# Altium PCB PCB_ch582_2022-06-16.pcbdoc
Units mil, origin at the board's own origin, x right, y up, seen from the top; angles counter-clockwise.
Board outline 2825 x 3330 mil, 2 copper layers (Top Layer, Bottom Layer); 23 components, 42 nets, 138 pads, 30 vias.
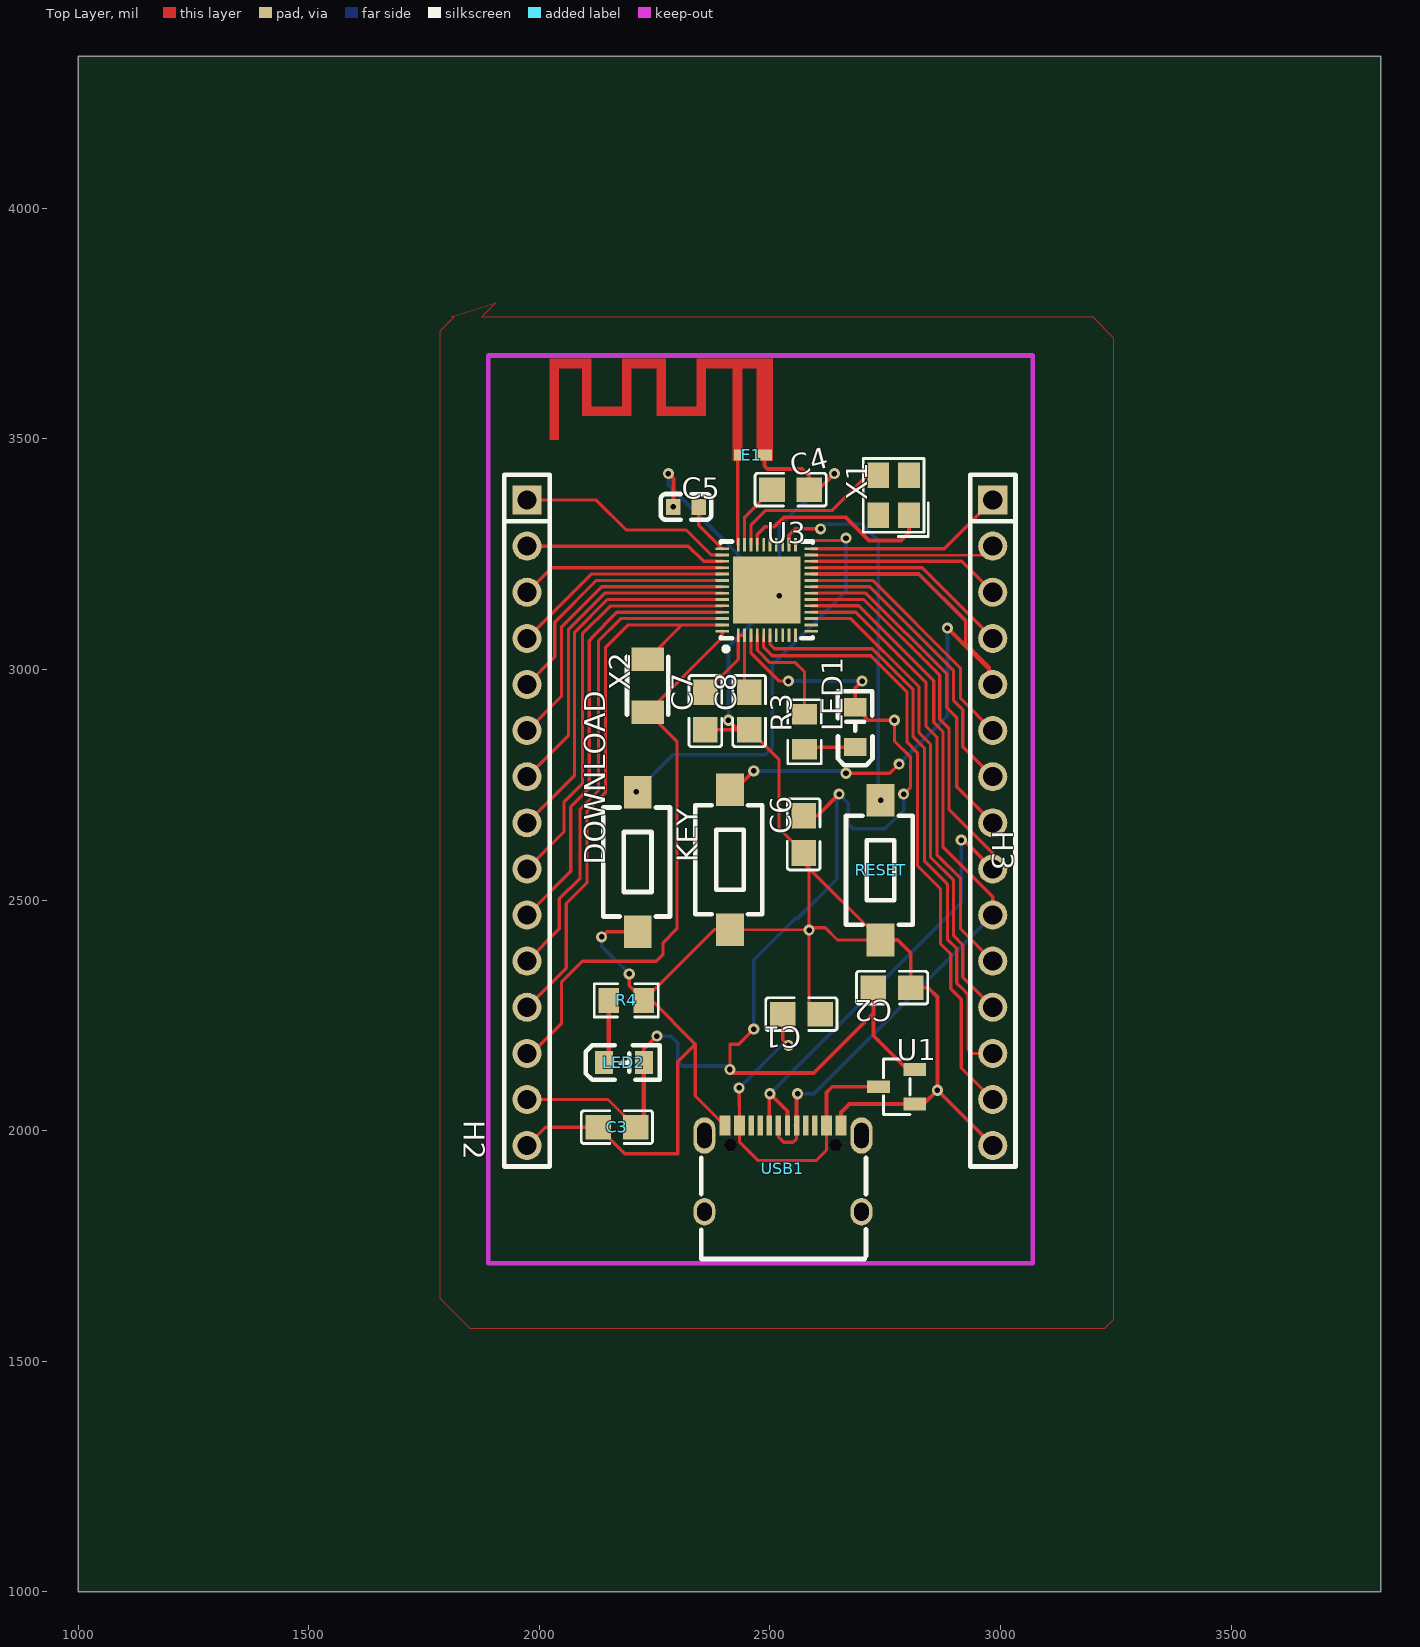
[diagram p0: Top Layer view]
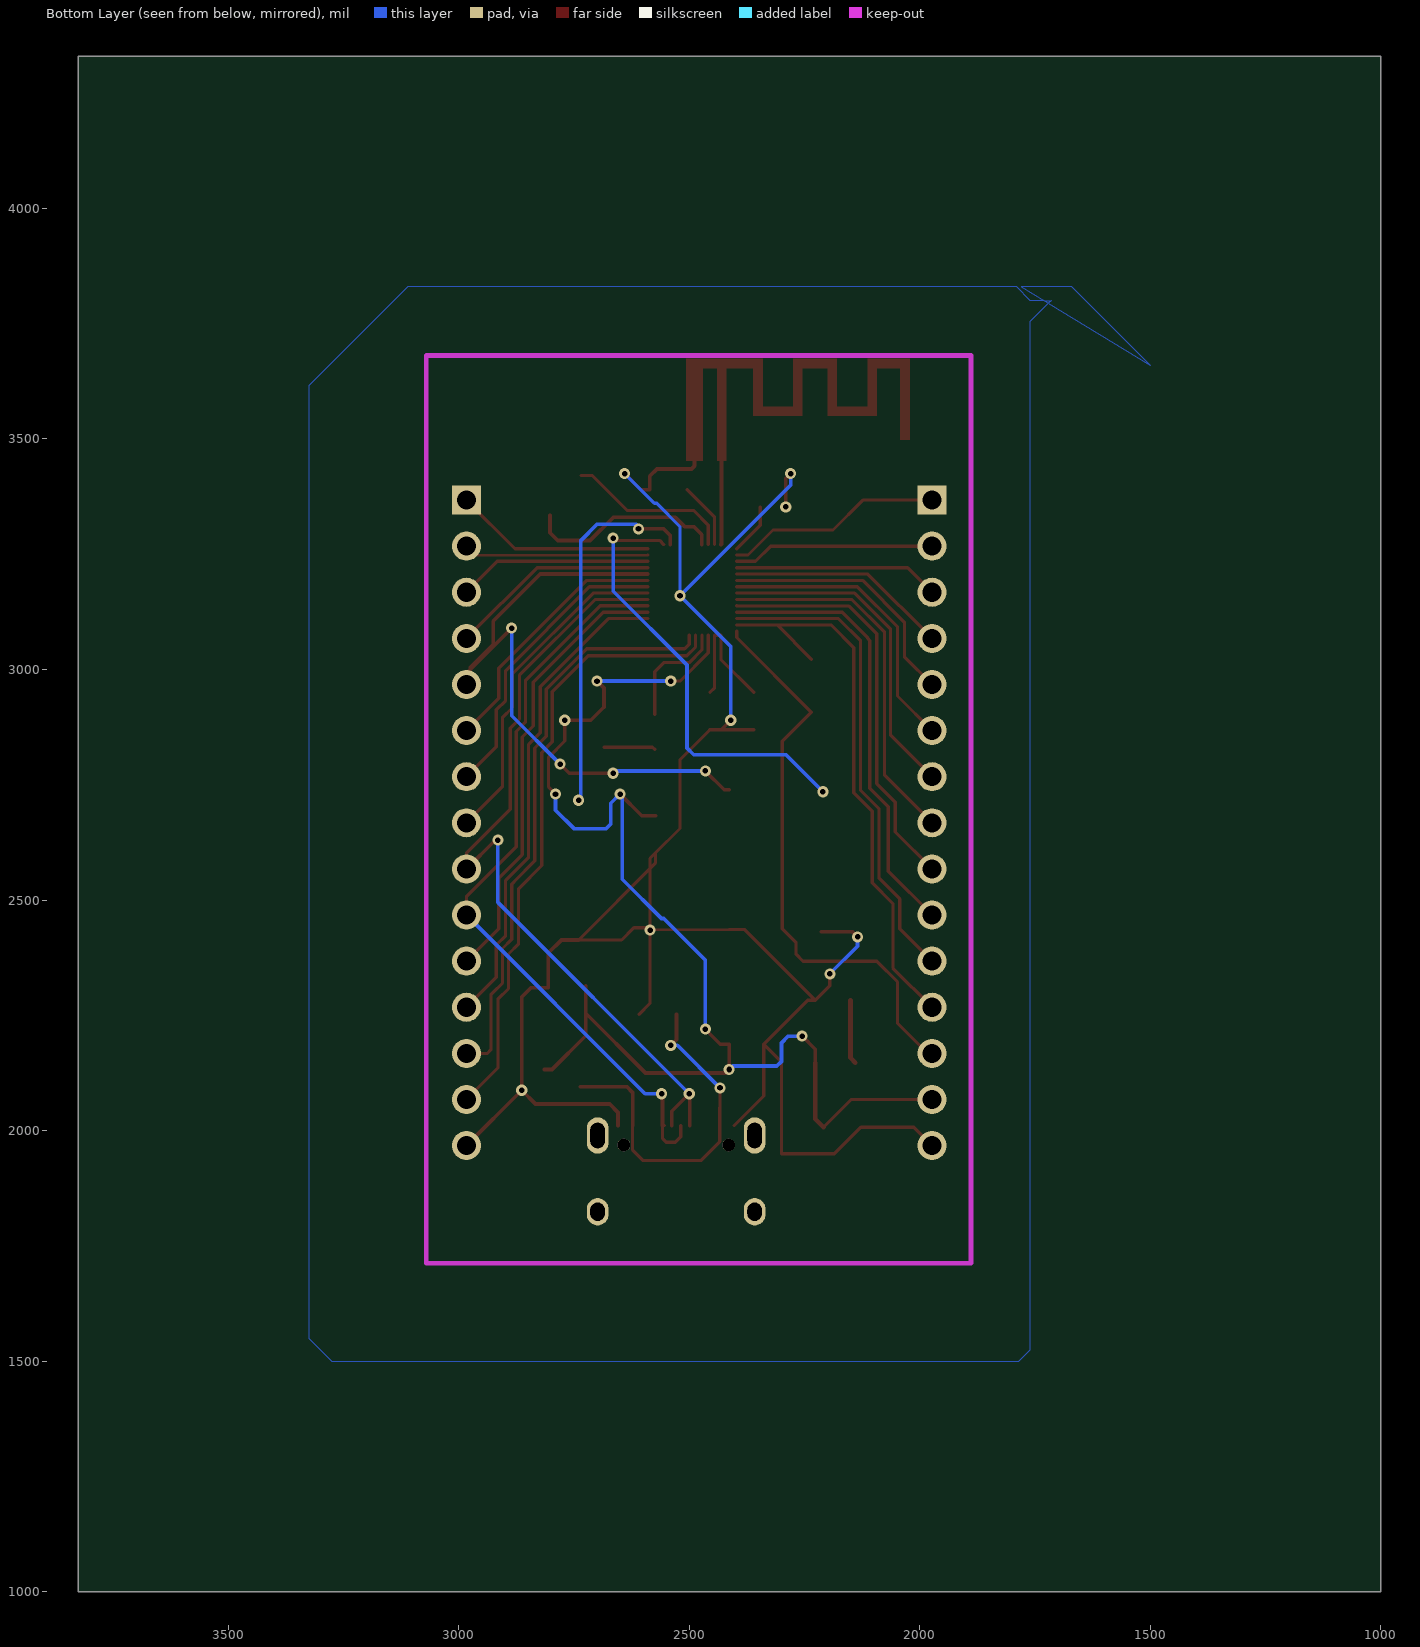
[diagram p1: Bottom Layer view, seen from below]

## Layer stack, top to bottom
Top Layer: signal copper (thickness not stored)
Dielectric: dielectric 12.6, FR-4, Dk 4.8
Bottom Layer: signal copper (thickness not stored)

## Board outline
3825,1000 1000,1000 1000,4330 3825,4330

## Components (designator, comment, footprint, x,y, rotation, side; value= is the part's Value field where it differs from the comment)
C1 "10uF" C0805 2568.27,2252.58 r180 top
C2 "2.2uF" C0805 2765,2310 r180 top
C3 "0.1uF" C0805 2168.27,2007.58 r0 top
C4 "2.2uF" C0805 2545,3390 r0 top
C5 "0.1pF" C0603 2318.27,3352.58 r0 top
C6 "2.2uF" C0805 2573.27,2642.58 r90 top
C7 "2.2uF" C0805 2360,2910 r90 top
C8 "2.2uF" C0805 2455,2910 r90 top
DOWNLOAD "TS3625A" KEY-SMD_L6.0-W3.5-LS8.4 2213.27,2582.58 r90 top
E1 "ANTENNA" ANT-F-1-2.4G-1.6 2430,3465 r0 top
H2 "Header-Male-2.54_1x15" HDR-TH_15P-P2.54-V-M 1973.27,2667.58 r270 top
H3 "Header-Male-2.54_1x15" HDR-TH_15P-P2.54-V-M 2983.27,2667.58 r270 top
KEY "TS3625A" KEY-SMD_L6.0-W3.5-LS8.4 2413.27,2587.58 r90 top
LED1 "RF-BGB170TS-CB-E0" LED0805-RD_BLUE 2685,2875 r90 top
LED2 "RF-BGB170TS-CB-E0" LED0805-RD_BLUE 2183.27,2147.58 r0 top
R3 "1kΩ" R0805 2575,2865 r90 top
R4 "1kΩ" R0805 2188.27,2282.58 r180 top
RESET "TS3625A" KEY-SMD_L6.0-W3.5-LS8.4 2740,2565 r90 top
U1 "XC6206-3.3NR" SOT-23-3_L2.9-W1.3-P0.95-LS2.4-BR 2775,2095 r0 top
U3 "CH582M-EVT" QFN-48_L5.0-W5.0-P0.35-BL-EP 2493.27,3172.58 r0 top
USB1 "TYPE-C 16PIN 2MD(073)" USB-C-SMD_TYPE-C-6PIN-2MD-073 2528.27,1917.58 r0 top
X1 "-" CRYSTAL-SMD_4P-L3.2-W2.5-BL 2768.27,3377.58 r90 top
X2 "32.768kHz" CRYSTAL-SMD_L3.2-W1.5 2235,2965 r90 top

## Footprints (in the part's own frame and the unit in brackets; to place one, negate y for a bottom-side part, rotate by r counter-clockwise, add the part's x,y. Pads: shape width x height; smd on the part's side, far side on the other; paste and mask are expansions set on the pad)
ANT-F-1-2.4G-1.6 [mm]
  rect 0.8x0.6 smd: 0(1.483,0)
  rect 0.4x0.6 smd: 1(0,0)
  Top Layer region: 0.24,5.027 -0.26,5.027 -0.26,-0.304 0.24,-0.304
  Top Layer region: 1.94,5.002 1.04,5.002 1.04,-0.304 1.94,-0.304
  Top Layer region: 1.94,5.296 -2.26,5.296 -2.26,4.796 1.94,4.796
  Top Layer region: -1.76,4.977 -2.26,4.977 -2.26,2.157 -1.76,2.157
  Top Layer region: -1.85,2.651 -4.39,2.651 -4.39,2.156 -1.85,2.156
  Top Layer region: -3.96,4.976 -4.46,4.976 -4.46,2.156 -3.96,2.156
  Top Layer region: -3.96,5.296 -6.36,5.296 -6.36,4.796 -3.96,4.796
  Top Layer region: -5.86,4.977 -6.36,4.977 -6.36,2.157 -5.86,2.157
  Top Layer region: -5.875,2.657 -8.364,2.657 -8.364,2.157 -5.875,2.157
  Top Layer region: -8.06,4.977 -8.56,4.977 -8.56,2.157 -8.06,2.157
  Top Layer region: -8.06,5.296 -10.36,5.296 -10.36,4.796 -8.06,4.796
  Top Layer region: -9.86,4.976 -10.36,4.976 -10.36,0.856 -9.86,0.856
C0603 [mm]
  rect 0.8x0.9 smd: 1(-0.7,0) 2(0.7,0)
  silkscreen extent -1.41,-0.71 1.39,0.72
C0805 [mm]
  rect 1.41x1.35 smd: 1(-1.03,0) 2(1.03,0)
  silkscreen extent -1.96,-0.9 1.96,0.9
CRYSTAL-SMD_4P-L3.2-W2.5-BL [mm]
  rect 1.4x1.2 smd: 1(-1.1,-0.85) 2(1.1,-0.85) 3(1.1,0.85) 4(-1.1,0.85)
  silkscreen extent -2.26,-1.91 2.03,1.68
CRYSTAL-SMD_L3.2-W1.5 [mm]
  rect 1.3x1.8 smd: 1(-1.458,0) 2(1.458,0)
  silkscreen extent -1.6,-1.14 1.6,1.14
HDR-TH_15P-P2.54-V-M [mm]
  rect 1.6x1.6 hole 1.05: 1(-17.78,0)
  round 1.6 hole 1.05: 2(-15.24,0) 3(-12.7,0) 4(-10.16,0) 5(-7.62,0) 6(-5.08,0) 7(-2.54,0) 8(0,0) 9(2.54,0) 10(5.08,0) 11(7.62,0) 12(10.16,0) 13(12.7,0) 14(15.24,0) 15(17.78,0)
  silkscreen extent -19.17,-1.25 18.93,1.25
KEY-SMD_L6.0-W3.5-LS8.4 [mil]
  rect 70.87x60 smd: 1(-151.58,0) 2(151.57,0)
  silkscreen extent -118,-70 118,75
LED0805-RD_BLUE [mm]
  rect 1x1.25 smd: 1(-1.1,0) 2(1.1,0)
  silkscreen extent -2.1,-0.95 1.98,0.96
QFN-48_L5.0-W5.0-P0.35-BL-EP [mm]
  rect 0.15x0.75 smd: 1(-1.575,-2.5) 2(-1.225,-2.5) 3(-0.875,-2.5) 4(-0.525,-2.5) 5(-0.175,-2.5) 6(0.175,-2.5) 7(0.525,-2.5) 8(0.875,-2.5) 9(1.225,-2.5) 10(1.575,-2.5) 25(1.575,2.5) 26(1.225,2.5) 27(0.875,2.5) 28(0.525,2.5) 29(0.175,2.5) 30(-0.175,2.5) 31(-0.525,2.5) 32(-0.875,2.5) 33(-1.225,2.5) 34(-1.575,2.5)
  rect 0.75x0.15 smd: 11(2.45,-2.275) 12(2.45,-1.925) 13(2.45,-1.575) 14(2.45,-1.225) 15(2.45,-0.875) 16(2.45,-0.525) 17(2.45,-0.175) 18(2.45,0.175) 19(2.45,0.525) 20(2.45,0.875) 21(2.45,1.225) 22(2.45,1.575) 23(2.45,1.925) 24(2.45,2.275) 35(-2.45,2.275) 36(-2.45,1.925) 37(-2.45,1.575) 38(-2.45,1.225) 39(-2.45,0.875) 40(-2.45,0.525) 41(-2.45,0.175) 42(-2.45,-0.175) 43(-2.45,-0.525) 44(-2.45,-0.875) 45(-2.45,-1.225) 46(-2.45,-1.575) 47(-2.45,-1.925) 48(-2.45,-2.275)
  rect 3.7x3.7 smd: 49(0,0)
  silkscreen extent -2.54,-3.38 2.54,2.67
R0805 [mil]
  rect 44.59x54.21 smd: 1(-38.04,0) 2(38.04,0)
  silkscreen extent -69,-36 69,36
SOT-23-3_L2.9-W1.3-P0.95-LS2.4-BR [mm]
  rect 1.25x0.7 smd: 1(1,-0.95) 2(1,0.95) 3(-1,0)
  silkscreen extent -0.73,-1.53 0.73,1.53
USB-C-SMD_TYPE-C-6PIN-2MD-073 [mm]
  rect 0.6x1.1 smd: 1(-3.2,2.375) 2(-2.4,2.375) 11(2.4,2.375) 12(3.2,2.375)
  rect 0.3x1.1 smd: 3(-1.75,2.375) 4(-1.25,2.375) 5(-0.75,2.375) 6(-0.25,2.375) 7(0.25,2.375) 8(0.75,2.375) 9(1.25,2.375) 10(1.75,2.375)
  oval 1.2x1.5 hole 0.8 slot 1 at 90 deg: 13(-4.325,-2.375) 14(4.325,-2.375)
  oval 1.2x2 hole 0.8 slot 1.4 at 90 deg: 13(-4.325,1.825) 14(4.325,1.825)
  round 0.7 hole 0.7 unplated: ""(-2.89,1.305) ""(2.89,1.305)
  silkscreen extent -4.5,-4.97 4.57,0.6

## Via types
v1: diameter 24, hole 12, Top Layer to Bottom Layer, tented both sides, 30 vias

## Nets (pads, with @x,y where several pads share a name; then routed paths per layer and width w, separated by ;. In a path a pad name is that pad's centre, name@x,y a point inside that pad or via, vN(x,y) a via of type N, cw(c..) or ccw(c..) an arc to the next point about the centre after c; other vN are vias at no path point)
3V3: C2.2 C3.2 C6.2 H2.14 LED1.2 LED2.2 U1.2 U3.3 | length 3041.5
  Top Layer w7: H2.14 2148.82,2067.58 C3.2 ; v1(2413.27,2132.58) 2413.27,2187.58 2432.58,2187.58 v1(2465,2220) ; U3.3@2458.82,3074.15 2458.82,3036.18 2520.01,2975 v1(2540,2975) ; LED1.2 2713.31,2890 v1(2770,2890) 2770,2845 2805,2810 2805,2745 v1(2790,2730) ; C2.2@2724.47,2309.98 C2.2@2724.47,2314.98
  Top Layer w8: LED2.2 2226.58,2176.58 v1(2255,2205) ; v1(2413.27,2132.58) 2420.85,2125 2595,2125 2724.45,2254.45 C2.2 2724.45,2205.55 2797.61,2132.4 U1.2 ; C6.2 2603.13,2683.13 v1(2650,2730) ; LED1.2 2685,2960 v1(2700,2975)
  Top Layer w10: C3.2 2226.58,2025.34 LED2.2
  Bottom Layer w8: v1(2255,2205) 2285,2205 2300,2190 2300,2150 2310,2140 2405.85,2140 v1(2413.27,2132.58) ; v1(2465,2220) 2465,2370 2555,2460 2560,2460 2645,2545 2645,2725 v1(2650,2730) 2670,2710 2670,2665 2680,2655 2750,2655 2790,2695 v1(2790,2730) ; v1(2540,2975) v1(2700,2975)
+5V: C1.2 U1.3 USB1.2 USB1.11 | length 792.5
  Top Layer w7: v1(2433.27,2092.58) USB1.2 ; USB1.2 2433.78,1976.22 2475,1935 2600,1935 2622.77,1957.77 USB1.11
  Top Layer w8: C1.2 2527.72,2197.28 v1(2540,2185) ; USB1.11 2622.77,2082.77 2635,2095 U1.3
  Bottom Layer w8: v1(2433.27,2092.58) 2525.69,2185 v1(2540,2185)
AN1_1: U3.34 | length 189.5
  Top Layer w8: 2430,3460 2430,3272.26 U3.34
ANT: E1.1
GND: C1.1 C2.1 C3.1 C4.2 C5.1 C6.1 C7.1 C8.1 DOWNLOAD.1 E1.0 H2.15 H3.15 KEY.1 R4.1 RESET.1 U1.1 U3.49 USB1.1 USB1.12 | length 5060.3
  Top Layer w7: H2.15 2013.27,2007.58 C3.1 2185.3,1950 2300,1950 2300,2149.31 2338.27,2187.58 ; v1(2195,2340) 2195,2313.89 R4.1 ; C7.1 C8.1 ; USB1.1 2338.27,2075.11 2338.27,2097.58 2338.27,2187.58 ; C8.1@2454.97,2869.48 2519.97,2804.48 2519.97,2655.28 C6.1@2573.27,2602.08 ; v1(2585,2435) KEY.1 2379.73,2436 R4.1 ; C1.1 2585,2276.4 v1(2585,2435) ; R4.1 2243.27,2282.58 2338.27,2187.58 ; v1(2585,2435) 2585,2590.3 C6.1 2573.27,2580.15 RESET.1 2646.58,2413.42 2620,2440 2590,2440 v1(2585,2435)
  Top Layer w8: v1(2135,2420) 2146,2431 DOWNLOAD.1 ; v1(2280,3425) 2290.71,3414.29 v1(2290.71,3352.58) ; v1(2410,2890) 2430.55,2869.45 C8.1 ; E1.0 2488.38,3441.62 2495,3435 2570,3435 2585.55,3419.45 C4.2 2605,3390 v1(2640,3425) ; USB1.12 2654.26,2039.26 2672.6,2057.6 U1.1 2833.24,2057.6 v1(2863.25,2087.6) ; RESET.1 2777.13,2413.42 2805.55,2385 C2.1 2843.25,2310 2863.25,2290 v1(2863.25,2087.6) ; H3.15 v1(2863.25,2087.6)
  Bottom Layer w7: v1(2520,3160) 2520,3310 2570.47,3360.47 2575.47,3360.47 v1(2640,3425)
  Bottom Layer w8: v1(2135,2420) 2135,2400 v1(2195,2340) ; v1(2280,3425) 2280,3400 v1(2520,3160) 2410,3050 v1(2410,2890)
LED1_1: LED1.1 R3.1 | length 112
  Top Layer w7: R3.1 2579.73,2831.69 LED1.1
LED2_1: LED2.1 R4.2 | length 139.3
  Top Layer w10: LED2.1 2150.23,2157.85 R4.2
PA0: H2.4 U3.39 | length 481.3
  Top Layer w7: H2.4 2112.72,3207.02 U3.39
PA1: H2.5 U3.40 | length 561
  Top Layer w7: H2.5 2033.27,3027.58 2033.27,3102.58 2123.93,3193.24 U3.40
PA2: H2.6 U3.41 | length 640.6
  Top Layer w7: H2.6 2048.27,2942.58 2048.27,3092.58 2135.16,3179.46 U3.41
PA3: H2.7 U3.42 | length 723.2
  Top Layer w7: H2.7 2063.27,2857.58 2063.27,3087.58 2141.38,3165.68 U3.42
PA4: H2.1 U3.36 | length 472.9
  Top Layer w7: H2.1 2123.27,3367.58 2188.27,3302.58 2318.27,3302.58 2372.49,3248.36 U3.36
PA5: H2.2 U3.37 | length 437.2
  Top Layer w7: H2.2 2323.27,3267.58 2356.26,3234.58 U3.37
PA6: H2.3 U3.38 | length 445.6
  Top Layer w7: H2.3 2026.49,3220.8 U3.38
PA7: R3.2 U3.4 | length 251.4
  Top Layer w7: U3.4@2472.57,3074.18 2472.57,3042.38 2499.95,3015 2555,3015 2574.97,2995.03 2574.97,2934.32 ; R3.2@2574.97,2903.08 2574.97,2939.98
PA8: H3.14 U3.5 | length 1337.7
  Top Layer w7: U3.5 2486.37,3048.58 2504.97,3029.98 2718.87,3029.98 2797.07,2951.78 2797.07,2842.98 2819.97,2819.98 2819.97,2574.98 2869.97,2524.98 2869.97,2404.98 2891.97,2383.08 2891.97,2308.08 2914.97,2284.98 2914.97,2135.88 H3.14
PA9: H3.13 U3.6 | length 1262.6
  Top Layer w7: U3.6 2500.17,3054.88 2509.97,3044.98 2722.37,3044.98 2810.17,2957.18 2810.17,2854.98 2834.97,2829.78 2834.97,2584.98 2879.97,2539.98 2884.97,2534.58 2884.97,2414.98 2904.97,2394.98 2904.97,2319.98 2919.97,2304.98 ; 2916.55,2308.4 2930,2294.95 2930,2175 2937.42,2167.58 H3.13
PA10: H2.13 U3.48 X2.1 | length 1242.9
  Top Layer w7: H2.13 1983.27,2167.58 2048.27,2232.58 2048.27,2322.58 2093.27,2367.58 2253.27,2367.58 2268.27,2382.58 2268.27,2407.58 2298.27,2437.58 2298.27,2844.33 X2.1 2396.82,3069.41 U3.48
PA11: H2.12 U3.47 X2.2 | length 1317
  Top Layer w7: H2.12 2058.27,2352.58 2058.27,2492.58 2103.27,2537.58 2103.27,2692.58 2143.27,2732.58 2143.27,3047.58 2192.49,3096.79 U3.47 2309.39,3096.79 X2.2
PA12: H2.11 U3.46 | length 1047.6
  Top Layer w7: H2.11 2043.27,2437.58 2043.27,2502.58 2088.27,2547.58 2088.27,2697.58 2128.27,2737.58 2128.27,3062.58 2176.26,3110.57 U3.46
PA13: H2.10 U3.45 | length 966.1
  Top Layer w7: H2.10 2068.27,2562.58 2068.27,2702.58 2108.27,2742.58 2108.27,3062.58 2113.27,3067.58 2113.27,3069.35 2168.27,3124.35 U3.45
PA14: H2.9 U3.44 | length 888.1
  Top Layer w7: H2.9 2053.27,2647.58 2053.27,2712.58 2093.27,2752.58 2093.27,3077.58 2153.27,3137.58 U3.44@2396.77,3138.18
PA15: H2.8 U3.43 | length 805.8
  Top Layer w7: H2.8 2076.32,2770.63 2076.32,3080.63 2147.61,3151.91 U3.43
PB0: H3.1 U3.24 | length 437.2
  Top Layer w7: U3.24 2877.84,3262.14 H3.1
PB1: H3.2 U3.23 | length 401.8
  Top Layer w7: U3.23@2589.77,3248.38 2963.27,3247.58 H3.2
PB2: H3.3 U3.22 | length 421.3
  Top Layer w7: U3.22 2916.26,3234.58 H3.3
PB3: H3.4 U3.21 | length 457
  Top Layer w7: U3.21 2830.05,3220.8 H3.4
PB4: H3.5 KEY.2 U3.20 | length 1434.7
  Top Layer w7: v1(2665,2775) 2760,2775 v1(2780,2795)
  Top Layer w8: KEY.2 2424.15,2739.15 v1(2465,2780) ; U3.20 2822.98,3207.02 2925,3105 2925,3055 2975,3005 2975,2975.85 H3.5 2983.27,2991.73 v1(2885,3090)
  Bottom Layer w8: v1(2465,2780) 2660,2780 v1(2665,2775) ; v1(2780,2795) 2885,2900 v1(2885,3090)
PB5: H3.6 U3.19 | length 566.5
  Top Layer w7: U3.19 2722.61,3193.24 2913.27,3002.58 2913.27,2937.58 H3.6
PB6: H3.7 U3.18 | length 649.1
  Top Layer w7: U3.18 2716.39,3179.45 2898.27,2997.58 2898.27,2932.58 2918.27,2912.58 2918.27,2832.58 H3.7
PB7: H3.8 U3.17 | length 730.5
  Top Layer w7: U3.17 2708.27,3165.67 2883.27,2990.67 2883.27,2917.58 2905.22,2895.63 2905.22,2745.63 H3.8
PB10: H3.9 U3.16 USB1.5 USB1.7 | length 1784.1
  Top Layer w7: U3.16@2589.77,3151.88 2703.57,3151.88 2868.27,2987.18 2868.27,2892.58 2888.27,2872.58 2888.27,2696.78 2983.27,2601.78 H3.9
  Top Layer w8: USB1.5@2498.75,2011.09 2498.75,2078.75 v1(2500,2080) 2538.12,2041.88 USB1.7 ; v1(2915,2630) 2920.85,2630 H3.9
  Bottom Layer w8: v1(2500,2080) 2914.97,2494.98 v1(2915,2630)
PB11: H3.10 U3.15 USB1.6 USB1.8 | length 1651.9
  Top Layer w7: USB1.6 2518.42,1986.58 2530,1975 2550,1975 2557.79,1982.79 USB1.8 USB1.8@2553.61,2011.09 ; U3.15 2692.71,3138.13 2855.22,2975.63 2855.22,2885.63 2875.22,2865.63 2875.22,2615.63 2983.27,2507.58 H3.10
  Top Layer w8: USB1.8 2557.79,2077.79 v1(2560,2080)
  Bottom Layer w8: v1(2560,2080) 2595.69,2080 H3.10
PB12: H3.11 U3.14 | length 976.5
  Top Layer w7: U3.14 2686.49,3124.35 2838.27,2972.58 2838.27,2877.58 2862.17,2853.68 2862.17,2598.68 2913.27,2547.58 2913.27,2437.58 H3.11
PB13: H3.12 U3.13 | length 1056.1
  Top Layer w7: U3.13 2675.28,3110.57 2823.27,2962.58 2823.27,2862.58 2848.27,2837.58 2848.27,2592.58 2898.27,2542.58 2898.27,2422.58 2918.27,2402.58 2918.27,2332.58 H3.12
PB22: RESET.2 U3.26 | length 812.5
  Top Layer w8: U3.26 2541.47,3291.47 2555,3305 v1(2610,3305)
  Bottom Layer w8: v1@2614.97,3299.98 2614.97,3314.98 2699.97,3314.98 2734.97,3279.98 v1@2734.97,2711.58
  other v1: 2740,2716.57
PB23: DOWNLOAD.2 U3.25 | length 974.1
  Top Layer w7: U3.25 2564.28,3280 2665,3280 v1(2665,3285)
  Bottom Layer w8: v1(2209.97,2734.98) 2289.99,2815 2490,2815 2505,2830 2505,3010 2665,3170 v1(2665,3285)
U3_1: C7.2 C8.2 U3.1 U3.2 | length 294.6
  Top Layer w7: C7.2 2431.26,3021.82 U3.1 2445.03,3074.15 2445.03,2960.51 C8.2
U3_33: C4.1 U3.33 | length 143.6
  Top Layer w7: U3.33 2445.03,3330.58 C4.1
VDCIA: C5.2 U3.35 | length 111.6
  Top Layer w7: C5.2 2345.83,3313.13 U3.35
X32MI: U3.32 X1.3 | length 362.8
  Top Layer w7: U3.32 2458.77,3313.08 2490.67,3344.98 2634.97,3344.98 2710.87,3420.88 X1.3
X32MO: U3.31 X1.1 | length 431.5
  Top Layer w8: U3.31 2472.57,3292.58 2489.97,3309.98 2509.97,3309.98 2529.97,3329.98 2664.97,3329.98 2714.97,3279.98 2784.97,3279.98 2801.77,3296.78 X1.1@2801.77,3334.28
pads on no net: U3.7 U3.8 U3.9 U3.10 U3.11 U3.12 U3.27 U3.28 U3.29 U3.30 USB1. USB1.3 USB1.4 USB1.9 USB1.10 USB1.13 USB1.14 X1.2 X1.4

## Polygon pours and split planes (outlines as drawn)
GND on Bottom Layer (solid): 1785,1500 1760,1525 1760,3755 1720.89,3794.11 1500,3660 1670,3830 1780,3830 1730.59,3800 1715,3800 1720.89,3794.11 1730.59,3800 1760,3800 1790,3830 3110,3830 3325,3615 3325,1550 3275,1500 1785,1500
GND on Top Layer (solid): 3245,1590 3225,1570 1850,1570 1785,1635 1785,3735 1815,3765 1810,3765 1905,3795 1875,3765 3200,3765 3245,3720 3245,1590

## Other copper
Top Layer:
  pour cut-out net ANT: 1895,3445 1890,3440 1890,3675 3065,3675 3065,3485 2695,3485 2690,3480 2690,3445 1895,3445
  pour cut-out net ANT: 2415,3455 2415,3290 2440,3290 2445,3295 2445,3455 2415,3455
Bottom Layer:
  pour cut-out net ANT: 2415,3455 2415,3290 2440,3290 2445,3295 2445,3455 2415,3455 2420,3450
  pour cut-out net ANT: 1890,3675 1890,3445 2685,3445 2690,3450 2690,3485 3065,3485 3065,3680 3060,3675 1890,3675